# Altium PCB SMC1940-A.PcbDoc (part 1 of 2)
Units mm, origin at the board's own origin, x right, y up, seen from the top; angles counter-clockwise.
Board outline 62.1 x 94.1 mm, 2 copper layers (Top Layer, Bottom Layer); 95 components, 94 nets, 577 pads, 44 vias.
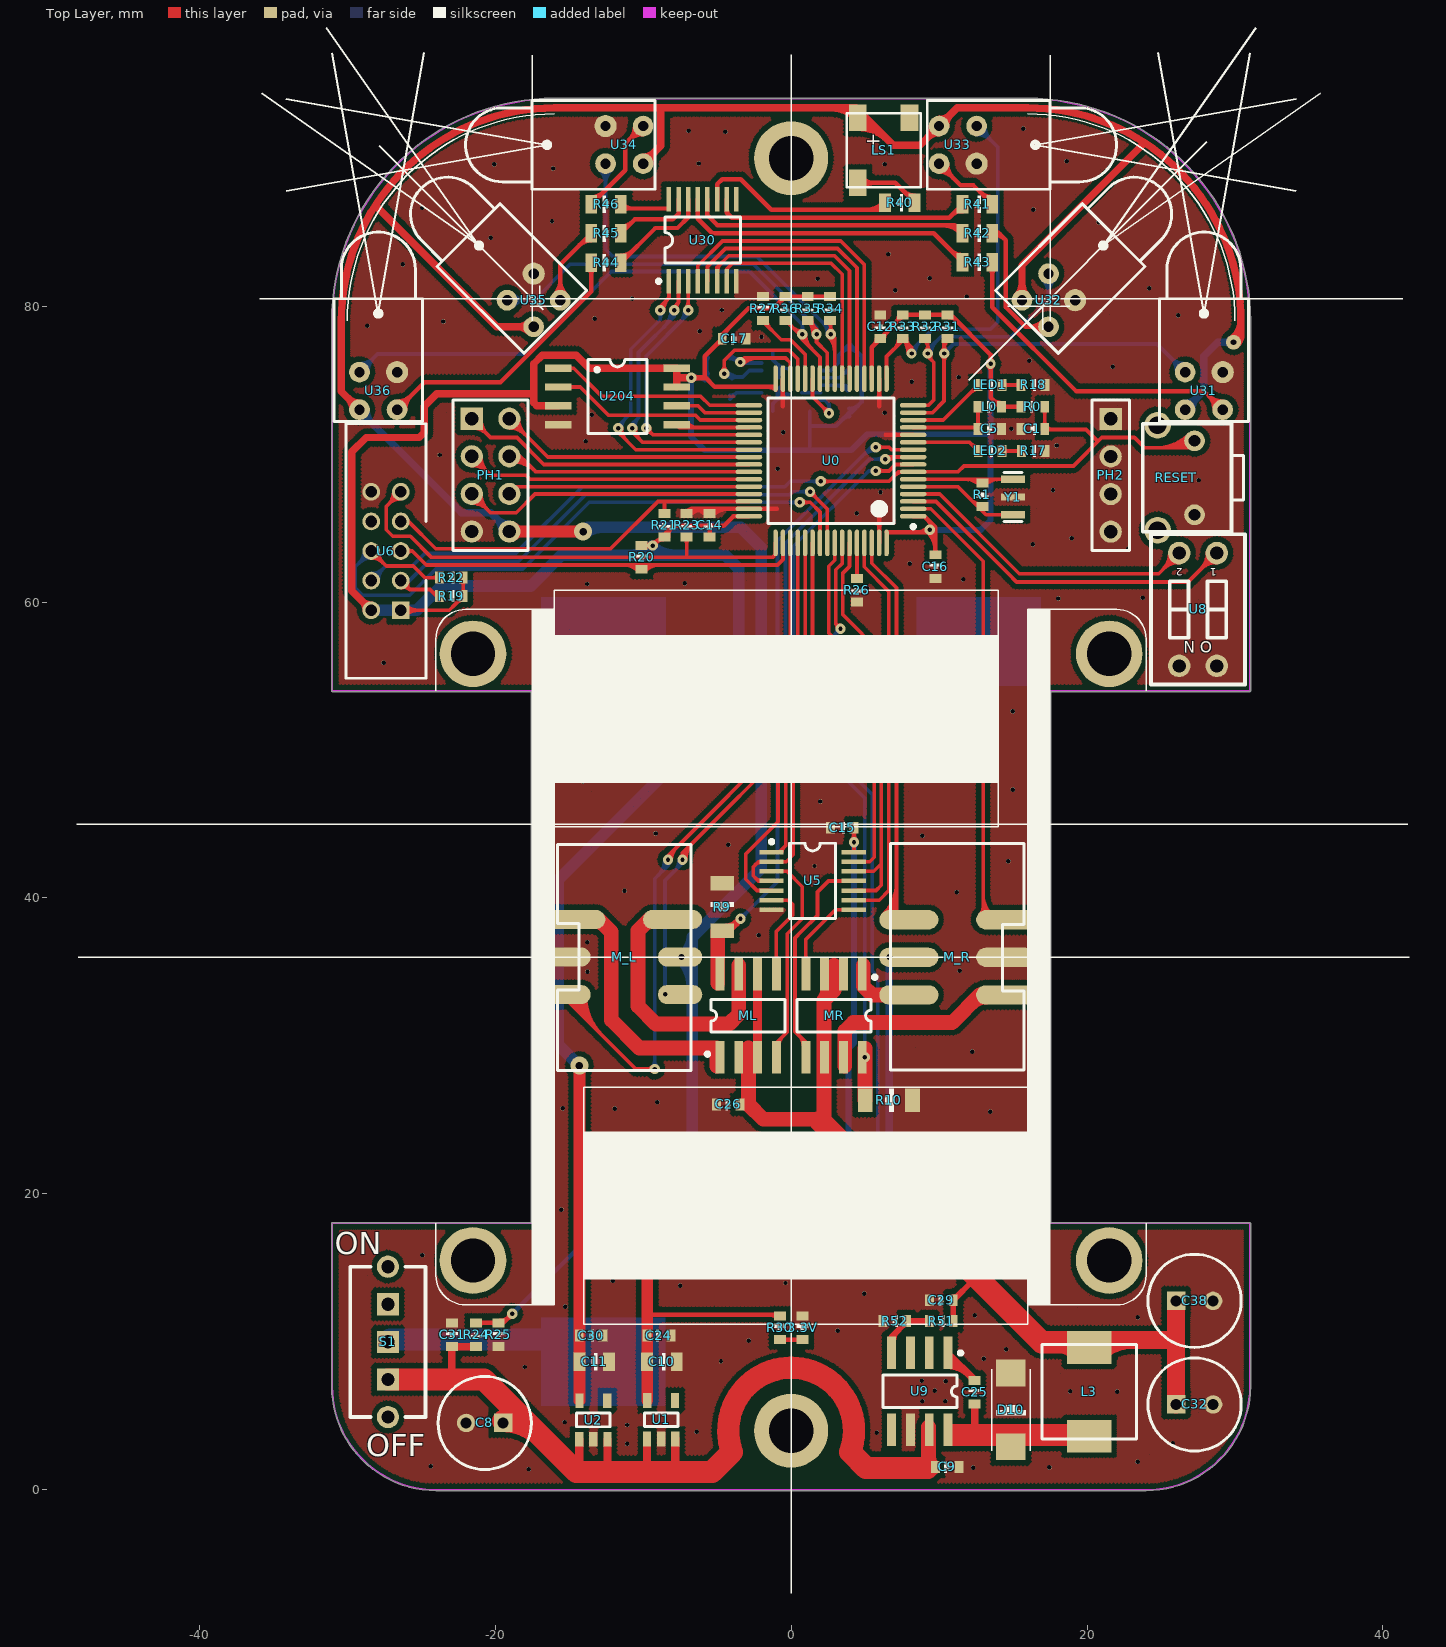
[diagram p0: Top Layer view]
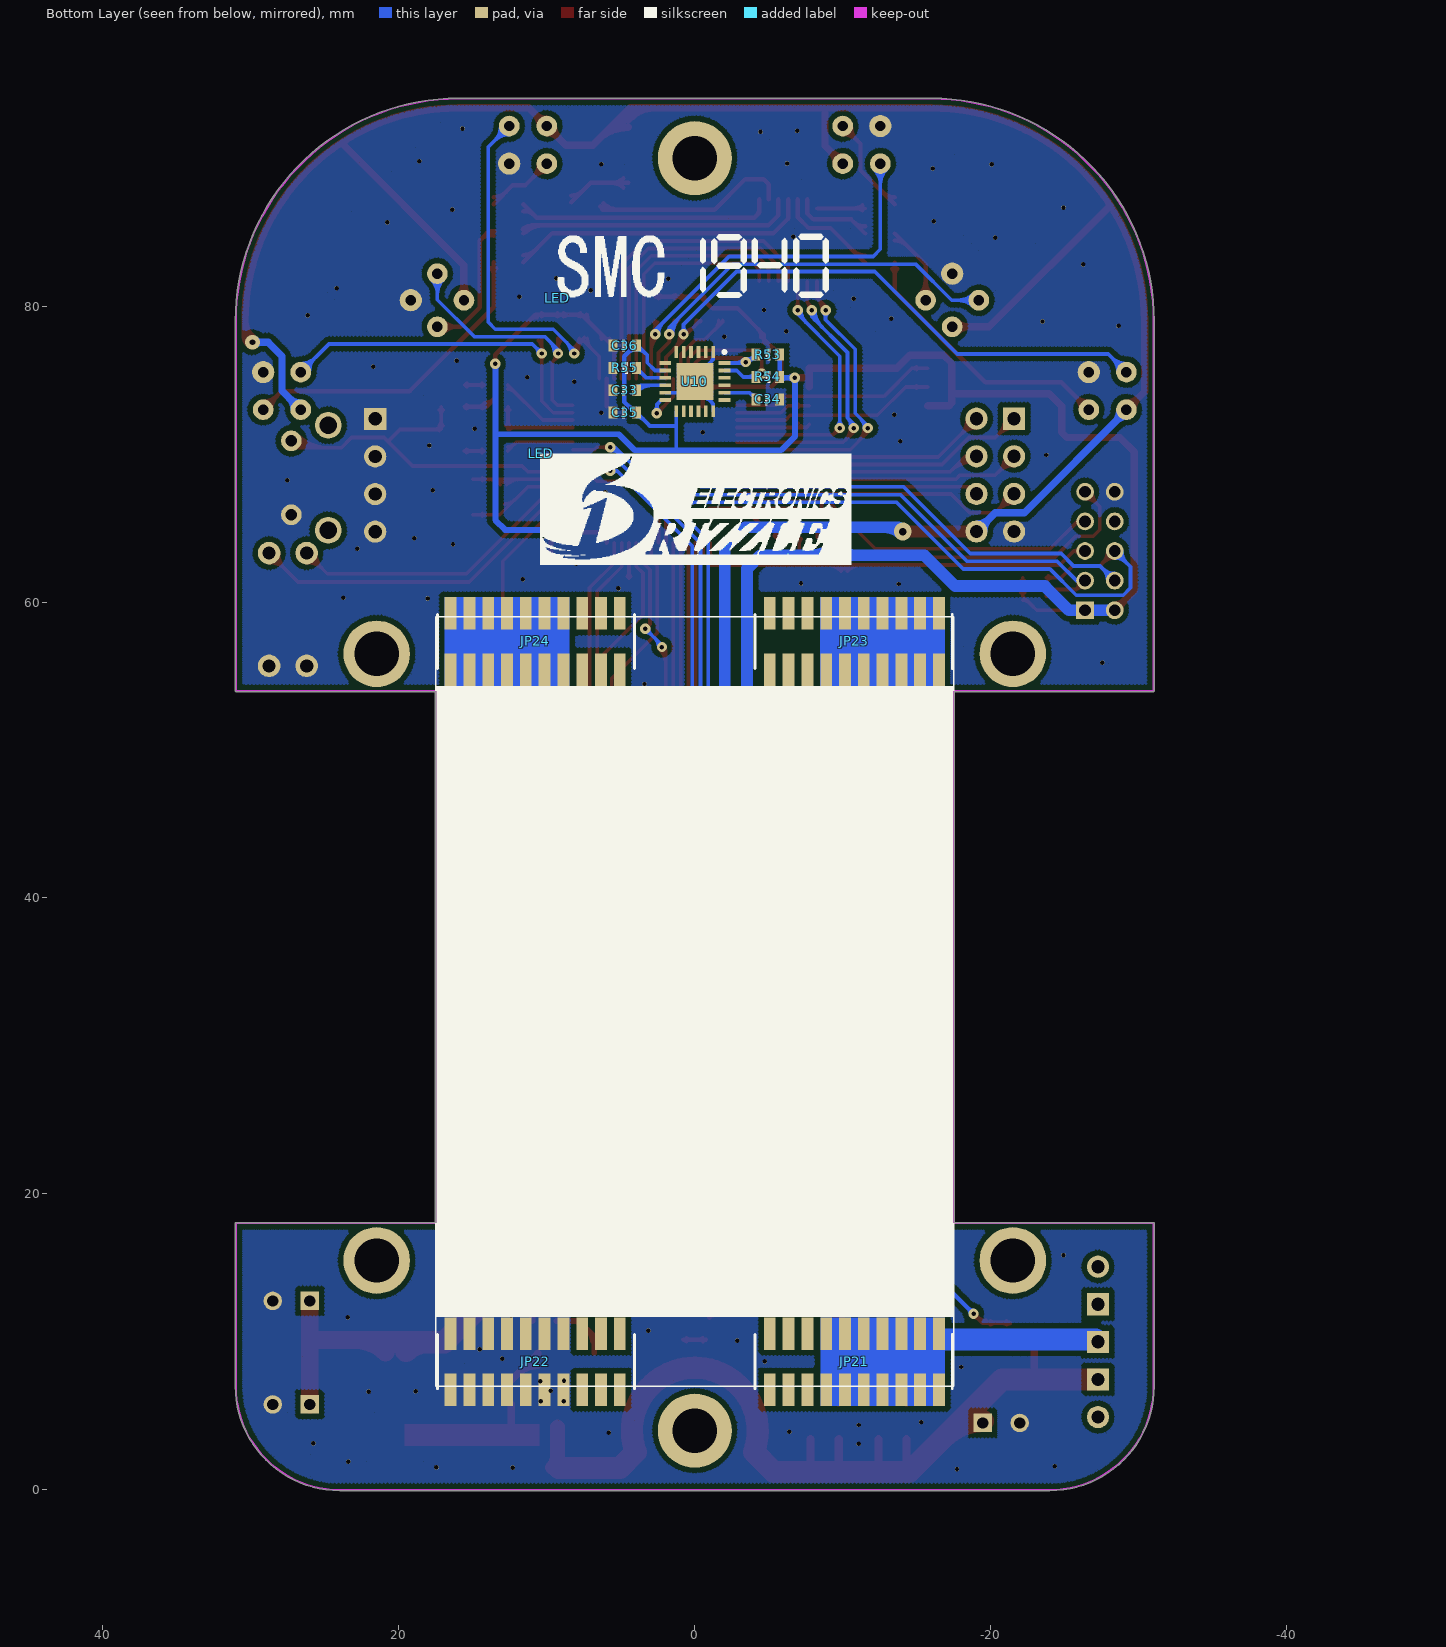
[diagram p1: Bottom Layer view, seen from below]

## Layer stack, top to bottom
Top Layer: signal copper 0.0356
Dielectric: dielectric 0.32, FR-4, Dk 4.8
Bottom Layer: signal copper 0.0356

## Board outline
-31.05,7 cw(c-31,7) -31.05,7.001 -31.05,7 ccw(c-24,7) -24,-0.05 24,-0.05 ccw(c24,7) 31.05,7 ccw(c31,7) 31.05,7.001 31.05,18 ccw(c31,18) 31,18.05 17.55,18.05 17.55,53.95 31,53.95 ccw(c31,54) 31.05,54 31.05,79 cw(c31,79) 31.05,78.999 31.05,79 ccw(c16,79) 16,94.05 -16,94.05 ccw(c-16,79) -31.05,79 ccw(c-31,79) -31.05,78.999 -31.05,54 ccw(c-31,54) -31,53.95 -17.55,53.95 -17.55,18.05 -31,18.05 ccw(c-31,18) -31.05,18

## Design rules (kind name [scope] priority, off if disabled: settings)
Clearance [All] p1: gap=0.2
FabricationTestPointUsage TestPointUsage [All] p1: valid=0 allowmultiple=FALSE
FabricationTestpoint Testpoint [All] p1: side=3 testpointundercomponent=TRUE minsize=1.016 maxsize=2.54 preferedsize=1.524 minholesize=0 maxholesize=1.016 preferedholesize=0.813 testpointgrid=0.025 allowsidetop=TRUE allowsidebottom=TRUE usegrid=TRUE gridtolerance=0
PlaneConnect [All] p1: planeconnectstyle=Direct reliefexpansion=0.508 reliefentries=4 reliefconductorwidth=0.254 reliefairgap=0.254
PolygonConnect [All] p1: connectstyle=Direct reliefconductorwidth=0.254 reliefentries=4 polygonreliefangle="90 Angle"
RoutingVias [All] p1: holewidth=0.711 width=1.27 viastyle="Through Hole" minholewidth=0.711 minwidth=1.27 maxholewidth=0.711 maxwidth=1.27
SilkscreenOverComponentPads [All] p1: minsilkscreentomaskgap=0.254
SolderMaskExpansion [All] p1: expansion=0.06
Width [All] p1: maxlimit=5 minlimit=0.01 preferedwidth=0.5 bottomlayer_prefwidth=0.25 minimp=50.000000 maximp=50.000000 favimp=50.000000
24 further rules are at their usual default settings.

## Components (designator, comment, footprint, x,y, rotation, side; value= is the part's Value field where it differs from the comment)
3.3V "LED0" YU-SMD0603 0.781,10.95 r90 top
C1 "104" YU-SMD0603 16.34,71.7 r0 top
C5 "104" YU-SMD0603 13.43,71.7 r180 top
C8 "100uF" CAPPR2.5-6.3X5 -20.71,4.52 r180 top locked
C9 "104" YU-SMD0603 10.55,1.55 r180 top
C10 "" YU-SMD0805 -8.73,8.66 r0 top
C11 "" YU-SMD0805 -13.31,8.66 r0 top
C12 "104" YU-SMD0603 6.03,78.61 r270 top
C14 "104" YU-SMD0603 -5.51,65.19 r270 top
C15 "104" YU-SMD0603 3.45,44.75 r0 top
C16 "104" YU-SMD0603 9.75,62.4 r90 top
C17 "104" YU-SMD0603 -3.85,77.8 r180 top
C24 "104" YU-SMD0603 -8.93,10.43 r180 top
C25 "103" YU-SMD0603 12.4,6.6 r90 top
C26 "104" YU-SMD0603 -4.25,26.05 r180 top
C29 "104" YU-SMD0603 10.16,12.81 r180 top
C30 "104" YU-SMD0603 -13.52,10.43 r0 top
C31 "104" YU-SMD0603 -22.91,10.48 r90 top
C32 "220uF" CAPPR2.5-6.3X5 27.27,5.77 r0 top locked
C33 "104" YU-SMD0603 4.73,74.311 r0 bottom
C34 "222" YU-SMD0603 -4.93,73.7 r0 bottom
C35 "104" YU-SMD0603 4.73,72.8 r0 bottom
C36 "104" YU-SMD0603 4.73,77.334 r0 bottom
C38 "220uF" CAPPR2.5-6.3X5 27.27,12.77 r0 top locked
D10 "B340A" DO-214 14.85,5.4 r270 top locked
JP21 "" MSHDR2X10#1 -16.5,9.3 r180 bottom locked
JP22 "" MSHDR2X10#2 16.5,9.3 r0 bottom locked
JP23 "" MSHDR2X10#2 -16.5,56.7 r180 bottom locked
JP24 "" MSHDR2X10#1 16.5,56.7 r0 bottom locked
L0 "10uH" YU-SMD0603 13.43,73.2 r180 top
L3 "15uH" HC0603 20.15,6.62 r90 top locked
LED "Comment" SMC1940 9.29,80.535 r180 bottom
LED "Comment" LOGO_EN_7.5 10.421,70.03 r180 bottom
LED1 "B" YU-SMD0603 13.45,74.67 r0 top
LED2 "R" YU-SMD0603 13.45,70.21 r0 top
LS1 "" 蜂鸣器5020 3.76,93.03 r270 top locked
M_L "" DC3-6PS#1 -12.55,38.55 r270 top locked
M_R "" DC3-6PS#2 12.5,33.45 r90 top locked
ML "BD6221F" SO-G8#1 -2.9,32.05 r0 top locked
MR "BD6221F" SO-G8#1 2.9,32.05 r180 top locked
PH1 "" HDR2X4 -21.58,72.39 r270 top locked
PH2 "Header 4" HDR1X4 21.6,72.38 r270 top locked
R0 "10K" YU-SMD0603 16.34,73.2 r180 top
R1 "1M" YU-SMD0603 12.93,67.25 r270 top
R9 "0.2" YU-SMD1206 -4.65,39.39 r90 top
R10 "0.2" YU-SMD1206 6.61,26.34 r0 top
R17 "" YU-SMD0603 16.36,70.21 r0 top
R18 "" YU-SMD0603 16.35,74.67 r0 top
R19 "10K" YU-SMD0603 -22.96,60.4 r0 top
R20 "10K" YU-SMD0603 -10.1,63.02 r90 top
R21 "10K" YU-SMD0603 -8.56,65.19 r270 top
R22 "10K" YU-SMD0603 -22.96,61.65 r0 top
R23 "10K" YU-SMD0603 -7.06,65.19 r270 top
R24 "20K" YU-SMD0603 -21.291,10.48 r270 top
R25 "10K" YU-SMD0603 -19.78,10.48 r90 top
R26 "10K" YU-SMD0603 4.45,60.8 r270 top
R27 "10K" YU-SMD0603 -1.9,79.84 r90 top
R30 "" YU-SMD0603 -0.76,10.95 r90 top
R31 "10K" YU-SMD0603 10.564,78.61 r270 top
R32 "10K" YU-SMD0603 9.052,78.61 r270 top
R33 "10K" YU-SMD0603 7.541,78.61 r270 top
R34 "10K" YU-SMD0603 2.634,79.84 r270 top
R35 "10K" YU-SMD0603 1.122,79.84 r270 top
R36 "10K" YU-SMD0603 -0.389,79.84 r270 top
R40 "100" YU-SMD0805 7.35,87 r0 top
R41 "100" YU-SMD0805 12.595,86.892 r0 top
R42 "100" YU-SMD0805 12.595,84.931 r0 top
R43 "100" YU-SMD0805 12.595,82.97 r0 top
R44 "100" YU-SMD0805 -12.51,82.94 r180 top
R45 "100" YU-SMD0805 -12.51,84.91 r180 top
R46 "100" YU-SMD0805 -12.51,86.881 r180 top
R51 "10K" YU-SMD0603 10.16,11.41 r0 top
R52 "2.32K" YU-SMD0603 7.01,11.41 r0 top
R53 "5.1K" YU-SMD0603 -4.93,76.722 r180 bottom
R54 "5.1K" YU-SMD0603 -4.93,75.211 r180 bottom
R55 "5.1K" YU-SMD0603 4.73,75.822 r180 bottom
RESET "SW-PB" KEY3*6C 23.77,64.75 r0 top locked
S1 "" SWITCH_L -27.25,10 r270 top locked
U0 "STM32F103RE" LQFP64_N 2.7,69.55 r180 top locked
U1 "SPX3819-5.0" YU-SOT23-5 -8.78,4.74 r0 top locked
U2 "SPX3819-3.3" YU-SOT23-5 -13.37,4.72 r0 top locked
U5 "74HC08" TSSO5x6-G14/X.3 1.45,41.15 r270 top locked
U6 "Header 5X2" DownLoad2-2*5 -27.38,63.45 r90 top locked
U8 "" SW-2 27.5,59.5 r180 top locked
U9 "TPS5430" SO-G8#2 8.7,6.65 r180 top locked
U10 "MPU-6050" QFN-24 0,74.9 r270 bottom locked
U30 "ULN2003APW" TSSO5x6-G16 -5.98,84.46 r0 top locked
U31 "" F5-2 27.9,73 r0 top locked
U32 "" F5-2 16.5,79.5 r315 top locked
U33 "" F5-2 10,90.9 r270 top locked
U34 "" F5-2 -10,90.9 r90 top locked
U35 "" F5-2 -16.5,79.5 r45 top locked
U36 "" F5-2 -27.9,73 r0 top locked
U204 "W25Q32" SOP8 -11.74,73.9 r0 top locked
Y1 "XTAL" 晶振3213 15,67.1 r90 top locked

## Footprints (in the part's own frame and the unit in brackets; to place one, negate y for a bottom-side part, rotate by r counter-clockwise, add the part's x,y. Pads: shape width x height; smd on the part's side, far side on the other; paste and mask are expansions set on the pad)
CAPPR2.5-6.3X5 [mm]
  rect 1.25x1.25 hole 0.75: 1(-1.25,0)
  round 1.25 hole 0.75: 2(1.25,0)
  silkscreen extent -3.15,-3.15 3.15,3.15
DC3-6PS#1 [mm]
  oval 1.3x4 smd: 1(0,-2) 2(0,4.54)
  oval 1.3x3 smd: 3(2.54,-2.5) 4(2.54,5.05) 5(5.08,-2.5) 6(5.08,5.05)
  silkscreen extent -5.08,-3.23 10.22,5.77
DC3-6PS#2 [mm]
  oval 1.3x4 smd: 1(0,-2) 2(0,4.54) 3(2.54,-2) 4(2.54,4.54) 5(5.08,-2) 6(5.08,4.54)
  silkscreen extent -5.08,-3.23 10.22,5.77
DO-214 [mm]
  rect 1.8x2 smd: 1(-2.5,0) 2(2.5,0)
  silkscreen extent -2.75,-1.3 2.75,1.3
DownLoad2-2*5 [mm]
  rect 1.2x1.2 hole 0.8: 1(-4,-1)
  round 1.2 hole 0.8: 2(-4,1) 3(-2,-1) 4(-2,1) 5(0,-1) 6(0,1) 7(2,-1) 8(2,1) 9(4,-1) 10(4,1)
  silkscreen extent -8.6,-2.7 8.6,2.7
F5-2 [mm]
  round 1.4 hole 0.7: 1(-1.27,0) 2(1.27,0) 4(-1.27,2.54)
  round 1.5 hole 0.7: 3(1.27,2.54)
  silkscreen extent -3,-0.8 3,12
HC0603 [mm]
  rect 2.2x3 smd: 1(-3,0) 2(3,0)
  silkscreen extent -3.2,-3.2 3.2,3.2
HDR1X4 [mm] "Connector; Header; 4 Position"
  rect 1.5x1.5 hole 0.9: 1(0,0)
  round 1.5 hole 0.9: 2(2.54,0) 3(5.08,0) 4(7.62,0)
  silkscreen extent -1.27,-1.27 8.89,1.27
HDR2X4 [mm] "Connector; Header; 4x2 Position"
  rect 1.5x1.5 hole 0.9: 1(0,0)
  round 1.5 hole 0.9: 2(0,2.54) 3(2.54,0) 4(2.54,2.54) 5(5.08,0) 6(5.08,2.54) 7(7.62,0) 8(7.62,2.54)
  silkscreen extent -1.27,-1.27 8.89,3.81
KEY3*6C [mm]
  round 1.8 hole 1.2: 0(1,0.1) 0(1,7.2)
  round 1.4 hole 0.8: 1(3.5,6.15) 2(3.5,1.15)
  silkscreen extent 0,0 6.79,7.3
LOGO_EN_7.5 [mm]
  silkscreen extent 0.03,-7.49 21.01,-0.03
LQFP64_N [mm]
  oval 1.8x0.3 smd: 1(-5.55,3.75) 2(-5.55,3.25) 3(-5.55,2.75) 4(-5.55,2.25) 5(-5.55,1.75) 6(-5.55,1.25) 7(-5.55,0.75) 8(-5.55,0.25) 9(-5.55,-0.25) 10(-5.55,-0.75) 11(-5.55,-1.25) 12(-5.55,-1.75) 13(-5.55,-2.25) 14(-5.55,-2.75) 15(-5.55,-3.25) 16(-5.55,-3.75) 33(5.55,-3.75) 34(5.55,-3.25) 35(5.55,-2.75) 36(5.55,-2.25) 37(5.55,-1.75) 38(5.55,-1.25) 39(5.55,-0.75) 40(5.55,-0.25) 41(5.55,0.25) 42(5.55,0.75) 43(5.55,1.25) 44(5.55,1.75) 45(5.55,2.25) 46(5.55,2.75) 47(5.55,3.25) 48(5.55,3.75)
  oval 0.3x1.8 smd: 17(-3.75,-5.55) 18(-3.25,-5.55) 19(-2.75,-5.55) 20(-2.25,-5.55) 21(-1.75,-5.55) 22(-1.25,-5.55) 23(-0.75,-5.55) 24(-0.25,-5.55) 25(0.25,-5.55) 26(0.75,-5.55) 27(1.25,-5.55) 28(1.75,-5.55) 29(2.25,-5.55) 30(2.75,-5.55) 31(3.25,-5.55) 32(3.75,-5.55) 49(3.75,5.55) 50(3.25,5.55) 51(2.75,5.55) 52(2.25,5.55) 53(1.75,5.55) 54(1.25,5.55) 55(0.75,5.55) 56(0.25,5.55) 57(-0.25,5.55) 58(-0.75,5.55) 59(-1.25,5.55) 60(-1.75,5.55) 61(-2.25,5.55) 62(-2.75,5.55) 63(-3.25,5.55) 64(-3.75,5.55)
  silkscreen extent -5.68,-4.25 4.25,4.57
MSHDR2X10#1 [mm]
  rect 0.8x2.2 smd: 1(0,1.26) 2(0,-2.53) 3(-1.27,1.26) 4(-1.27,-2.53) 5(-2.54,1.26) 6(-2.54,-2.53) 7(-3.81,1.26) 8(-3.81,-2.53) 9(-5.08,1.26) 10(-5.08,-2.53) 11(-6.35,1.26) 12(-6.35,-2.53) 13(-7.62,1.26) 14(-7.62,-2.53) 15(-8.89,1.26) 16(-8.89,-2.53) 17(-10.16,1.26) 18(-10.16,-2.53) 19(-11.43,1.26) 20(-11.43,-2.53)
  silkscreen extent -12.43,-2.47 0.9,1.2
MSHDR2X10#2 [mm]
  rect 0.8x2.2 smd: 1(0,-1.26) 2(0,2.53) 3(-1.27,-1.26) 4(-1.27,2.53) 5(-2.54,-1.26) 6(-2.54,2.53) 7(-3.81,-1.26) 8(-3.81,2.53) 9(-5.08,-1.26) 10(-5.08,2.53) 11(-6.35,-1.26) 12(-6.35,2.53) 13(-7.62,-1.26) 14(-7.62,2.53) 15(-8.89,-1.26) 16(-8.89,2.53) 17(-10.16,-1.26) 18(-10.16,2.53) 19(-11.43,-1.26) 20(-11.43,2.53)
  silkscreen extent -12.43,-1.2 0.9,2.47
QFN-24 [mm] "0.5mm"
  rect 2.5x2.5 smd: 0(0,0)
  rect 0.8x0.25 smd: 1(-2,1.25) 2(-2,0.75) 3(-2,0.25) 4(-2,-0.25) 5(-2,-0.75) 6(-2,-1.25) 13(2,-1.25) 14(2,-0.75) 15(2,-0.25) 16(2,0.25) 17(2,0.75) 18(2,1.25)
  rect 0.25x0.8 smd: 7(-1.25,-2) 8(-0.75,-2) 9(-0.25,-2) 10(0.25,-2) 11(0.75,-2) 12(1.25,-2) 19(1.25,2) 20(0.75,2) 21(0.25,2) 22(-0.25,2) 23(-0.75,2) 24(-1.25,2)
  silkscreen extent -2.1,1.9 -1.9,2.1
SMC1940 [mm]
  silkscreen extent 0.05,0 18.36,4.37
SO-G8#1 [mm]
  rect 0.6x2.2 smd: 1(-1.905,-2.8) 2(-0.635,-2.8) 3(0.635,-2.8) 4(1.905,-2.8) 5(1.905,2.8) 6(0.635,2.8) 7(-0.635,2.8) 8(-1.905,2.8)
  silkscreen extent -2.88,-2.72 2.5,1.1
SO-G8#2 [mm]
  rect 0.6x2.2 smd: 1(-1.905,-2.6) 2(-0.635,-2.6) 3(0.635,-2.6) 4(1.905,-2.6) 5(1.905,2.6) 6(0.635,2.6) 7(-0.635,2.6) 8(-1.905,2.6)
  silkscreen extent -2.88,-2.72 2.5,1.1
SOP8 [mm]
  rect 1.8x0.5 smd: 1(-4,1.905) 2(-4,0.635) 3(-4,-0.635) 4(-4,-1.905) 5(4,-1.905) 6(4,-0.635) 7(4,0.635) 8(4,1.905)
  silkscreen extent -2,-2.5 2,2.5
SW-2 [mil]
  round 60 hole 35: 1(-50,-150) 2(50,-150) 3(-50,150) 4(50,150)
  silkscreen extent -125,-200 125,200
SWITCH_L [mm]
  round 1.5 hole 0.9: 0(-5.08,0) 0(5.08,0)
  rect 1.5x1.5 hole 0.9: 1(-2.54,0) 2(0,0) 3(2.54,0)
  silkscreen extent -5.08,-2.54 5.08,2.54
TSSO5x6-G14/X.3 [mm]
  rect 0.3x1.65 smd: 1(-1.95,-2.775) 2(-1.3,-2.775) 3(-0.65,-2.775) 4(0,-2.775) 5(0.65,-2.775) 6(1.3,-2.775) 7(1.95,-2.775) 8(1.95,2.775) 9(1.3,2.775) 10(0.65,2.775) 11(0,2.775) 12(-0.65,2.775) 13(-1.3,2.775) 14(-1.95,2.775)
  silkscreen extent -2.77,-2.9 2.55,1.55
TSSO5x6-G16 [mm]
  rect 0.3x1.65 smd: 1(-2.275,-2.775) 2(-1.625,-2.775) 3(-0.975,-2.775) 4(-0.325,-2.775) 5(0.325,-2.775) 6(0.975,-2.775) 7(1.625,-2.775) 8(2.275,-2.775) 9(2.275,2.775) 10(1.625,2.775) 11(0.975,2.775) 12(0.325,2.775) 13(-0.325,2.775) 14(-0.975,2.775) 15(-1.625,2.775) 16(-2.275,2.775)
  silkscreen extent -3.1,-2.9 2.55,1.55
YU-SMD0603 [mm]
  rect 0.6x0.8 smd: 1(-0.8,0) 2(0.8,0)
  silkscreen extent -0.15,-0.4 0.2,0.4
YU-SMD0805 [mm]
  rect 0.8x1.25 smd: 1(-1,0) 2(1,0)
  silkscreen extent -0.19,-0.59 0.23,0.59
YU-SMD1206 [mm]
  rect 1x1.6 smd: 1(-1.6,0) 2(1.6,0)
  silkscreen extent -0.28,-0.79 0.35,0.79
YU-SOT23-5 [mm]
  rect 0.55x1 smd: 1(-0.95,-1.304) 2(0,-1.304) 3(0.95,-1.304) 4(0.94,1.295) 5(-0.94,1.295)
  silkscreen extent -1.14,-0.46 1.14,0.46
晶振3213 [mm]
  rect 0.5x1.63 smd: 0(0,0)
  rect 0.5x1.6 smd: 1(-1.2,0) 2(1.2,0)
  silkscreen extent -1.65,-0.6 1.65,0.6
蜂鸣器5020 [mm]
  rect 1.8x1.2 smd: 0(0.3,4.25) 1(0.3,0.75) 2(4.7,0.75)
  silkscreen extent 0,0 5,5

## Part data
3.3V: "Typical INFRARED GaAs LED"
C1 C5 C9 C12 C14 C15 C16 C17 C24 C25 C26 C29 C30 C31 C33 C34 C35 C36: library part Cap, "Capacitor"
C8 C32 C38: library part "Cap Pol2", "Polarized Capacitor (Axial)"
C10 C11: library part "Cap Pol1", "Polarized Capacitor (Radial)"
D10: library part "Diode 11DQ03", "Schottky Rectifier"
JP21 JP22 JP23 JP24: library part MHDR2X10, "Header, 10-Pin, Dual row"
L0: library part Res1, "Resistor"
L3: library part "Inductor Iron", "Magnetic-Core Inductor"
LED1 LED2: library part LED0, "Typical INFRARED GaAs LED"
LS1: library part Speaker, "Loudspeak"
M_L M_R: library part "Header 3X2", "Header, 3-Pin, Dual row"
PH1 PH2: library part "Header 4X2", "Header, 4-Pin, Dual row"
R0 R1 R9 R10 R17 R18 R19 R20 R21 R22 R23 R24 R25 R26 R27 R30 R31 R32 R33 R34 R35 R36 R40 R41 R42 R43 R44 R45 R46 R51 R52 R53 R54 R55: library part Res2, "Resistor"
S1: library part SW-SPDT, "SPDT Subminiature Toggle Switch, Right Angle Mounting, Vertical Actuation"
U0: library part STM32F101RC, "STM32 ARM-based 32-bit MCU with 128 Kbytes Flash, 64-pin LQFP, Industrial Temperature"
U1 U2: library part REG1117-3.3, "800mA and 1A Low Dropout Positive Regulator 2.85V, 3.3V, 5V, and Adjustable"
U5: library part MC74HC08AD, "Quad 2-Input AND Gate"
U6: "Header, 5-Pin, Dual row"
U8: library part "Header 2X2", "Header, 2-Pin, Dual row"
U9: library part TPS2430
U30: library part ULN2003D, "Seven Darlington Array"
U31 U32 U33 U34 U35 U36: library part 光耦
U204: library part FM25H20
Y1: "Crystal Oscillato"

## Free pads (board coordinates)
  round 4.5 hole 3: 0(-21.5,15.5) 0(-21.5,56.5) 0(21.5,15.5) 0(21.5,56.5)
  round 0.3 hole 0.3: 0(-4.74,8.68) 0(-4.2,23.78) 0(12.3,1.5) 1(-15.26,12.38) 1(8.839,7.366) 2(-24.92,15.86) 2(10.44,7.34) 3(-24.34,1.6) 3(5.8,3.86) 4(-17.72,1.4) 4(8.86,6) 5(-15.3,4.58) 5(10.42,6) 6(-11.08,4.38) 6(4.94,13.26) 7(-6.38,3.92) 7(9.72,6.7) 8(-18,8.3) 8(14.54,9.5) 9(-11.54,20.38) 10(-11.08,3.1) 11(-11.22,17.4) 12(-12.06,14.14) 13(-7.5,13.8) 14(-3.88,16.16) 15(-0.74,23.12) 16(-10.08,22.8) 17(-11.92,25.76) 18(-2.86,10.08) 19(3.14,10.76) 20(-0.38,13.98) 21(13.02,8.86) 22(3.28,16.2) 23(18.86,6.66) 24(22.04,6.64) 25(23.42,1.9) 26(23.44,11.66) 27(10.86,19.16) 28(14.28,15.68) 29(25.78,3.14) 30(12.42,11.8) 31(17.46,1.52) 32(12.24,29.62) 33(13.46,25.56) 34(9.46,23.7) 35(13.82,20.76) 36(-15.44,25.78) 37(-15.52,18.94) 38(-9.04,26.2) 39(-13.76,35.02) 40(-13.78,37.02) 41(11.4,35.08) 42(11.2,40.4) 43(8.86,44.2) 44(11.32,48.34) 45(14.98,52.62) 46(14.98,47.32) 47(14.68,42.48) 48(9.16,52.66) 49(1.98,46.52) 50(3.4,54.46) 51(1.58,42.16) 52(4.22,50.92) 53(-2.2,37.48) 54(-4.24,43.6) 55(-11.26,40.48) 56(-9.16,44.36) 57(-5.22,48.04) 58(-14.08,51.78) 59(-9.22,51.64) 60(-14.08,47.88) 61(-27.54,55.9) 62(-13.78,61.22) 63(-7.18,61.26) 64(-13.88,70.88) 65(-13.48,72.66) 66(-23.76,69.94) 67(4.44,66) 68(-0.9,69) 69(-0.54,71.48) 70(6.32,72.78) 71(6.04,67.42) 72(5.16,60.92) 73(8.02,62.6) 74(11.62,61.54) 75(18.06,60.24) 76(16.34,63.9) 77(23.76,60.28) 78(18.96,64.32) 79(17.7,67.56) 80(22.8,63.6) 81(27.54,68.24) 82(17.94,70.58) 83(16.1,76.32) 84(8.16,74.9) 85(11.32,75.2) 86(14.88,71.7) 87(21.74,75.9) 88(26.16,79.38) 89(24.2,81.22) 90(18.62,89.8) 91(15.7,92) 92(16.38,86.52) 93(20.78,85.66) 94(6.58,83.52) 95(7.04,81.06) 96(9.36,81.88) 97(1.8,81.84) 98(11.86,80.62) 99(6.32,89.6) 100(-6.92,91.84) 101(-4.44,91.78) 102(-6.24,89.64) 103(-2,77.92) 104(-4.68,79.74) 105(-6.18,78.3) 106(-13.28,79.16) 107(-10.74,80.5) 108(-6.66,84.68) 109(-23.5,78.96) 110(-28.64,78.66) 111(-20.3,84.62) 112(-24.92,86.66) 113(-20.06,89.58) 114(-16.08,89.3) 115(-16.16,85.74) 116(-26.24,82.82)
  round 5 hole 3: 0(0,4) 0(0,90)

## Via types
v1: diameter 0.7, hole 0.3, Top Layer to Bottom Layer, tented both sides, 38 vias
v2: diameter 1.2, hole 0.5, Top Layer to Bottom Layer, tented both sides, 3 vias
v3: diameter 1, hole 0.4, Top Layer to Bottom Layer, tented both sides, 3 vias

## Nets (pads, with @x,y where several pads share a name; then routed paths per layer and width w, separated by ;. In a path a pad name is that pad's centre, name@x,y a point inside that pad or via, vN(x,y) a via of type N, cw(c..) or ccw(c..) an arc to the next point about the centre after c; other vN are vias at no path point)
3.3V: C11.1 C12.2 C14.2 C15.2 C16.2 C17.2 C30.1 C35.1 C36.1 L0.1 R0.2 R19.2 R20.2 R21.2 R22.2 R31.1 R32.1 R33.1 R34.1 R35.1 R36.1 R53.2 R54.2 U0.1 U0.19 U0.32 U0.48 U0.64 U2.5 U5.14 U6.1 U6.2 U10.8 U10.13 U204.3 U204.7 U204.8 | length 362
  Top Layer w0.25: U6.1@-26.38,59.45 -23.11,59.45 -22.723,59.837 R19.2@-22.16,60.4 R22.2@-22.16,61.65 ; U6.1@-26.044,59.114 cw(c-25.233,58.303) -25.233,59.45 cw(c-25.233,60.597) U6.1@-26.044,59.786 ; -22.16,60.922 ccw(c-21.738,60.922) -22.036,60.624 cw(c-21.738,60.922) -22.16,60.922 ; -22.16,60.922 cw(c-22.582,60.922) -22.284,60.624 ccw(c-22.582,60.922) -22.16,60.922 ; -22.16,61.128 ccw(c-22.582,61.128) -22.284,61.426 cw(c-22.582,61.128) -22.16,61.128 ; -22.16,61.128 cw(c-21.738,61.128) -22.036,61.426 ccw(c-21.738,61.128) -22.16,61.128 ; -22.629,59.931 cw(c-22.16,59.461) -22.16,60.125 ccw(c-22.16,59.461) -22.629,59.931
  Top Layer w0.3: R20.2@-10.1,63.82 v1(-9.36,63.82) ; v1@-9.34,63.82 -9.28,63.88 -8.665,64.495 -8.56,64.6 -8,65.16 ; -5.84,75.16 -5.84,76.61 C17.2@-4.65,77.8 -4.65,78.09 -2.88,79.86 -1.169,79.86 R36.1@-0.389,80.64 R34.1@2.634,80.64 ; -5.84,75.22 -5.16,74.54 U0.32@-1.1,74.54 ; C14.2@-5.51,64.39 -5.51,65.15 ; U0.48@-2.85,65.8 -3.9,65.8 -4.54,65.16 -8,65.16 ; U5.14@4.25,43.125 C15.2@4.25,44.75 ; U0.19@5.45,75.1 5.45,77.23 7.63,79.41 10.79,79.41 13.48,76.72 13.48,73.82 14.1,73.2 L0.1@14.23,73.2 R0.2@15.54,73.2 ; U0.64@6.45,64.72 9.22,64.72 v1(9.38,64.88) ; U0.1@8.25,65.8 9,65.8 9.75,65.05 C16.2@9.75,63.2 ; R20.2@-9.843,63.82 ccw(c-9.843,64.303) -9.501,63.961 cw(c-9.843,64.303) R20.2@-9.843,63.82 ; R20.2@-9.843,63.82 cw(c-9.843,63.337) -9.501,63.679 ccw(c-9.843,63.337) R20.2@-9.843,63.82 ; v1@-9.638,63.82 ccw(c-9.638,63.458) -9.894,63.714 cw(c-9.638,63.458) v1@-9.638,63.82 ; v1@-9.638,63.82 cw(c-9.638,64.182) -9.894,63.926 ccw(c-9.638,64.182) v1@-9.638,63.82 ; -8,65.16 ccw(c-7.251,64.411) -8.31,64.393 cw(c-7.251,64.411) -8,65.16 ; -5.51,64.752 ccw(c-5.148,64.752) -5.404,64.496 cw(c-5.148,64.752) -5.51,64.752 ; -5.51,64.752 cw(c-5.872,64.752) -5.616,64.496 ccw(c-5.872,64.752) -5.51,64.752 ; 0.073,80.64 ccw(c0.073,80.278) -0.183,80.534 cw(c0.073,80.278) 0.073,80.64 ; 0.073,80.64 cw(c0.073,81.002) -0.183,80.746 ccw(c0.073,81.002) 0.073,80.64 ; 0.66,80.64 ccw(c0.66,81.002) 0.916,80.746 cw(c0.66,81.002) 0.66,80.64 ; 0.66,80.64 cw(c0.66,80.278) 0.916,80.534 ccw(c0.66,80.278) 0.66,80.64 ; 1.585,80.64 ccw(c1.585,80.278) 1.328,80.534 cw(c1.585,80.278) 1.585,80.64 ; 1.585,80.64 cw(c1.585,81.002) 1.328,80.746 ccw(c1.585,81.002) 1.585,80.64 ; 2.171,80.64 ccw(c2.171,81.002) 2.428,80.746 cw(c2.171,81.002) 2.171,80.64 ; 2.171,80.64 cw(c2.171,80.278) 2.428,80.534 ccw(c2.171,80.278) 2.171,80.64 ; 4.25,44.243 ccw(c4.733,44.243) 4.391,43.901 cw(c4.733,44.243) 4.25,44.243 ; 4.25,44.243 cw(c3.767,44.243) 4.109,43.901 ccw(c3.767,44.243) 4.25,44.243 ; 4.25,44.288 ccw(c3.888,44.288) 4.144,44.544 cw(c3.888,44.288) 4.25,44.288 ; 4.25,44.288 cw(c4.612,44.288) 4.356,44.544 ccw(c4.612,44.288) 4.25,44.288 ; 8.003,79.41 ccw(c8.003,79.048) 7.747,79.304 cw(c8.003,79.048) 8.003,79.41 ; 8.003,79.41 cw(c8.003,79.772) 7.747,79.516 ccw(c8.003,79.772) 8.003,79.41 ; 8.59,79.41 ccw(c8.59,79.772) 8.846,79.516 cw(c8.59,79.772) 8.59,79.41 ; 8.59,79.41 cw(c8.59,79.048) 8.846,79.304 ccw(c8.59,79.048) 8.59,79.41 ; 9.515,79.41 ccw(c9.515,79.048) 9.258,79.304 cw(c9.515,79.048) 9.515,79.41 ; 9.515,79.41 cw(c9.515,79.772) 9.258,79.516 ccw(c9.515,79.772) 9.515,79.41 ; 9.75,63.562 ccw(c10.112,63.562) 9.856,63.306 cw(c10.112,63.562) 9.75,63.562 ; 9.75,63.562 cw(c9.388,63.562) 9.644,63.306 ccw(c9.388,63.562) 9.75,63.562 ; 10.101,79.41 ccw(c10.101,79.772) 10.358,79.516 cw(c10.101,79.772) 10.101,79.41 ; 10.101,79.41 cw(c10.101,79.048) 10.358,79.304 ccw(c10.101,79.048) 10.101,79.41 ; 13.48,75.617 ccw(c12.997,75.617) 13.339,75.959 cw(c12.997,75.617) 13.48,75.617 ; 13.48,75.617 cw(c13.963,75.617) 13.621,75.959 ccw(c13.963,75.617) 13.48,75.617 ; 13.48,76.583 ccw(c13.963,76.583) 13.621,76.241 cw(c13.963,76.583) 13.48,76.583 ; 13.48,76.583 cw(c12.997,76.583) 13.339,76.241 ccw(c12.997,76.583) 13.48,76.583 ; 14.592,73.2 ccw(c14.592,72.838) 14.336,73.094 cw(c14.592,72.838) 14.592,73.2 ; 14.592,73.2 cw(c14.592,73.562) 14.336,73.306 ccw(c14.592,73.562) 14.592,73.2 ; 15.178,73.2 ccw(c15.178,73.562) 15.434,73.306 cw(c15.178,73.562) 15.178,73.2 ; 15.178,73.2 cw(c15.178,72.838) 15.434,73.094 ccw(c15.178,72.838) 15.178,73.2 ; v1@-9.36,64.02 ccw(c-9.36,64.551) -8.984,64.176 cw(c-9.36,64.551) v1@-9.36,64.02 ; v1@-9.16,63.82 cw(c-8.725,63.82) -9.033,64.127 ccw(c-8.725,63.82) v1@-9.16,63.82 ; v1@-9.104,64.056 cw(c-8.66,63.612) -8.66,64.24 ccw(c-8.66,63.612) v1@-9.104,64.056 ; -5.077,77.373 cw(c-4.65,76.946) -4.65,77.55 ccw(c-4.65,76.946) -5.077,77.373 ; C17.2@-4.5,77.9 cw(c-3.679,77.9) -4.26,78.48 ccw(c-3.679,77.9) C17.2@-4.5,77.9 ; -1.509,74.54 cw(c-1.509,73.891) -1.05,74.35 ccw(c-1.509,73.891) -1.509,74.54 ; -0.816,80.213 ccw(c-1.242,80.64) -0.639,80.64 cw(c-1.242,80.64) -0.816,80.213 ; 5.603,77.383 ccw(c5.176,77.81) 5.78,77.81 cw(c5.176,77.81) 5.603,77.383 ; C12.2@6.28,77.81 cw(c6.884,77.81) 6.457,78.237 ccw(c6.884,77.81) C12.2@6.28,77.81 ; 7.052,78.832 ccw(c6.473,79.41) 7.291,79.41 cw(c6.473,79.41) 7.052,78.832 ; 8.511,64.72 ccw(c8.511,65.749) 9.239,65.021 cw(c8.511,65.749) 8.511,64.72 ; 9.204,65.596 cw(c8.536,64.927) 9.48,64.874 ccw(c8.536,64.927) 9.204,65.596 ; v1@9.239,64.739 cw(c8.004,63.504) 9.75,63.504 ccw(c8.004,63.504) v1@9.239,64.739 ; v1@9.451,64.951 cw(c8.728,64.228) 9.75,64.228 ccw(c8.728,64.228) v1@9.451,64.951 ; R31.1@10.664,79.26 cw(c10.664,78.593) 11.135,79.065 ccw(c10.664,78.593) R31.1@10.664,79.26 ; 13.595,73.705 ccw(c14.211,74.321) 14.227,73.45 cw(c14.211,74.321) 13.595,73.705
  Top Layer w0.4: -14.26,21.44 v1(-3.54,21.44) ; v1(-6.76,75.16) -5.82,75.16 ; -6.398,75.16 ccw(c-6.398,74.798) -6.654,75.054 cw(c-6.398,74.798) -6.398,75.16 ; -6.398,75.16 cw(c-6.398,75.522) -6.654,75.266 ccw(c-6.398,75.522) -6.398,75.16 ; -3.902,21.44 ccw(c-3.902,21.802) -3.646,21.546 cw(c-3.902,21.802) -3.902,21.44 ; -3.902,21.44 cw(c-3.902,21.078) -3.646,21.334 ccw(c-3.902,21.078) -3.902,21.44
  Top Layer w0.5: U6.2@-28.38,59.45 -29.69,60.76 -29.69,70.15 -28.72,71.12 -25.14,71.12 -24.8,71.46 -24.8,73.24 -23.96,74.08 -17.38,74.08 ; U204.3@-15.74,73.265 -17.185,73.265 -17.38,73.46 -17.38,76.12 -16.82,76.68 -14.52,76.68 -13.645,75.805 U204.8@-7.74,75.805 U204.7@-7.74,74.535 ; -7.74,75.16 v1(-6.76,75.16) ; -28.977,60.047 ccw(c-28.38,60.645) -28.38,59.8 cw(c-28.38,60.645) -28.977,60.047 ; -28.977,60.047 cw(c-29.575,59.45) -28.73,59.45 ccw(c-29.575,59.45) -28.977,60.047
  Top Layer w0.8: U2.5@-14.31,6.015 v2(-14.31,28.67)
  Bottom Layer w0.25: 1.25,70.35 U10.13@1.25,72.9 ; U10.8@2,75.65 2.69,75.65 3.22,76.18 3.22,76.7 C36.1@3.854,77.334 ; C35.1@3.908,72.778 C35.1@3.93,72.8 ; 3.33,76.81 cw(c3.93,76.21) 3.93,77.059 ccw(c3.93,76.21) 3.33,76.81
  Bottom Layer w0.3: R54.2@-5.73,75.211 R53.2@-5.73,76.722 ; 1.3,71.9 3.03,71.9 C35.1@3.908,72.778 ; C35.1@3.93,72.8 4.04,72.8 4.76,73.52 4.76,76.62 C36.1@4.02,77.36 ; -5.73,75.673 ccw(c-5.368,75.673) -5.624,75.417 cw(c-5.368,75.673) -5.73,75.673 ; -5.73,75.673 cw(c-6.092,75.673) -5.836,75.417 ccw(c-6.092,75.673) -5.73,75.673 ; -5.73,76.26 ccw(c-6.092,76.26) -5.836,76.516 cw(c-6.092,76.26) -5.73,76.26 ; -5.73,76.26 cw(c-5.368,76.26) -5.624,76.516 ccw(c-5.368,76.26) -5.73,76.26 ; 3.503,72.373 cw(c3.93,71.946) 3.93,72.55 ccw(c3.93,71.946) 3.503,72.373 ; C35.1@3.93,73.05 ccw(c3.93,73.919) 4.545,73.305 cw(c3.93,73.919) C35.1@3.93,73.05 ; C36.1@3.93,77.084 cw(c3.93,76.199) 4.555,76.824 ccw(c3.93,76.199) C36.1@3.93,77.084
  Bottom Layer w0.4: R54.2@-5.73,75.16 v1(-6.76,75.16) -6.76,71.18 -5.84,70.26 4.06,70.26 5.14,71.34 13.48,71.34 ; v1(-3.54,21.44) 2.52,21.44 3.88,22.8 3.88,29.82 4.25,30.19 v1(4.25,43.76) ; v1(9.38,64.88) 12.82,64.88 13.48,65.54 v1(13.48,76.1) ; -6.76,74.798 ccw(c-7.122,74.798) -6.866,75.054 cw(c-7.122,74.798) -6.76,74.798 ; -6.76,74.798 cw(c-6.398,74.798) v1@-6.654,75.054 ; -6.76,74.798 cw(c-6.398,74.798) v1@-6.654,75.054 ; v1@-6.654,75.054 cw(c-6.398,74.798) -6.398,75.16 ; v1@-6.654,75.054 cw(c-6.398,74.798) -6.398,75.16 ; -6.398,75.16 cw(c-6.398,75.522) -6.654,75.266 ccw(c-6.398,75.522) -6.398,75.16 ; -3.178,21.44 ccw(c-3.178,21.078) -3.434,21.334 cw(c-3.178,21.078) -3.178,21.44 ; -3.178,21.44 cw(c-3.178,21.802) -3.434,21.546 ccw(c-3.178,21.802) -3.178,21.44 ; 4.25,43.398 ccw(c3.888,43.398) 4.144,43.654 cw(c3.888,43.398) 4.25,43.398 ; 4.25,43.398 cw(c4.612,43.398) 4.356,43.654 ccw(c4.612,43.398) 4.25,43.398 ; 9.742,64.88 ccw(c9.742,64.518) 9.486,64.774 cw(c9.742,64.518) 9.742,64.88 ; 9.742,64.88 cw(c9.742,65.242) 9.486,64.986 ccw(c9.742,65.242) 9.742,64.88 ; 13.48,75.738 ccw(c13.118,75.738) 13.374,75.994 cw(c13.118,75.738) 13.48,75.738 ; 13.48,75.738 cw(c13.842,75.738) 13.586,75.994 ccw(c13.842,75.738) 13.48,75.738 ; -6.089,75.16 cw(c-6.089,74.752) -5.801,75.04 ccw(c-6.089,74.752) -6.089,75.16
  Bottom Layer w0.7: -9.36,63.18 v1(-9.36,63.82)
  Bottom Layer w0.8: U6.2@-28.38,59.45 -25.29,59.45 -23.66,61.08 -17.6,61.08 -15.52,63.16 -4.44,63.16 -3.54,62.26 -3.54,53.42 -15.76,41.2 -15.76,30.12 v2(-14.31,28.67) ; -10.833,63.16 ccw(c-10.833,65.293) -9.325,63.785 cw(c-10.833,65.293) -10.833,63.16 ; v1@-9.395,63.785 ccw(c-7.887,65.293) -7.887,63.16 cw(c-7.887,65.293) v1@-9.395,63.785
5V: C10.1 C24.2 LS1.1 M_L.4 M_R.4 PH1.8 R30.2 U1.5 U31.1 U32.1 U33.1 U34.1 U35.1 U36.1 | length 327.1
  Top Layer w0.3: -9.73,11.84 R30.2@-0.76,11.84 ; -1.439,11.84 cw(c-1.439,11.171) -0.966,11.644 ccw(c-1.439,11.171) -1.439,11.84
  Top Layer w0.5: U36.1@-29.17,73 -30.4,74.23 -30.4,79 cw(c-16,79) -16,93.4 4.38,93.4 6.9,90.88 8.71,90.88 11.23,93.4 16,93.4 cw(c16,79) 30.4,79 ; -28.04,86.76 -19.882,78.602 U35.1@-17.398,78.602 ; U34.1@-10,89.63 -8.8,90.83 -8.8,93.3 ; U32.1@15.602,80.398 15.602,82.762 23.8,90.96 ; v3(29.9,77.56) 30.4,78.06 30.4,79 ; -29.938,73.768 ccw(c-29.17,74.536) -29.17,73.45 cw(c-29.17,74.536) -29.938,73.768 ; -29.938,73.768 cw(c-30.706,73) -29.62,73 ccw(c-30.706,73) -29.938,73.768 ; -18.484,78.602 ccw(c-18.484,79.688) -17.716,78.92 cw(c-18.484,79.688) -18.484,78.602 ; -18.484,78.602 cw(c-18.484,77.516) -17.716,78.284 ccw(c-18.484,77.516) -18.484,78.602 ; -9.232,90.398 ccw(c-8.464,89.63) -9.55,89.63 cw(c-8.464,89.63) -9.232,90.398 ; -9.232,90.398 cw(c-10,91.166) -10,90.08 ccw(c-10,91.166) -9.232,90.398 ; 9.232,91.402 ccw(c8.464,92.17) 9.55,92.17 cw(c8.464,92.17) 9.232,91.402 ; 9.232,91.402 cw(c10,90.634) 10,91.72 ccw(c10,90.634) 9.232,91.402 ; 10.768,92.938 ccw(c11.536,92.17) 10.45,92.17 cw(c11.536,92.17) 10.768,92.938 ; 10.768,92.938 cw(c10,93.706) 10,92.62 ccw(c10,93.706) 10.768,92.938 ; 15.602,81.484 ccw(c16.688,81.484) 15.92,80.716 cw(c16.688,81.484) 15.602,81.484 ; 15.602,81.484 cw(c14.516,81.484) 15.284,80.716 ccw(c14.516,81.484) 15.602,81.484 ; 30.327,77.987 ccw(c30.754,77.56) 30.15,77.56 cw(c30.754,77.56) 30.327,77.987 ; 30.327,77.987 cw(c29.9,78.414) 29.9,77.81 ccw(c29.9,78.414) 30.327,77.987 ; 30.4,79 cw(c28.893,79) 29.757,77.765 ccw(c28.893,79) 30.4,79 ; 2.772,93.4 cw(c2.772,91.292) 4.263,92.783 ccw(c2.772,91.292) 2.772,93.4 ; LS1.1@3.979,93.4 cw(c3.979,92.499) 4.616,93.136 ccw(c3.979,92.499) LS1.1@3.979,93.4 ; LS1.1@4.51,92.08 cw(c4.51,89.207) 6.541,91.239 ccw(c4.51,89.207) LS1.1@4.51,92.08 ; LS1.1@4.51,92.58 cw(c4.51,90.914) 5.688,92.092 ccw(c4.51,90.914) LS1.1@4.51,92.58 ; LS1.1@4.51,93.08 cw(c4.51,92.621) 4.834,92.946 ccw(c4.51,92.621) LS1.1@4.51,93.08 ; v3@30.043,77.355 ccw(c29.564,78.04) 30.4,78.04 cw(c29.564,78.04) v3@30.043,77.355
  Top Layer w0.8: PH1.8@-19.04,64.77 v2(-14.06,64.76) ; U1.5@-9.72,6.035 -9.72,15.46 v2(-6.68,18.5) ; -18.195,64.768 ccw(c-18.197,63.923) -18.793,64.522 cw(c-18.197,63.923) -18.195,64.768 ; -18.195,64.768 cw(c-18.193,65.613) -18.792,65.017 ccw(c-18.193,65.613) -18.195,64.768
  Bottom Layer w0.5: U36.1@-29.17,73 -29.17,72.93 -22.28,66.04 -20.31,66.04 PH1.8@-19.04,64.77 ; v2(-6.68,18.5) 3.78,18.5 6.64,21.36 v3(6.64,36) ; U31.1@26.63,73 27.9,74.27 27.9,76.62 28.84,77.56 v3(29.9,77.56) ; -19.894,65.624 ccw(c-19.04,66.477) -19.04,65.27 cw(c-19.04,66.477) -19.894,65.624 ; -19.894,65.624 cw(c-20.747,64.77) -19.54,64.77 ccw(c-20.747,64.77) -19.894,65.624 ; -5.835,18.5 ccw(c-5.835,17.655) -6.433,18.253 cw(c-5.835,17.655) -5.835,18.5 ; -5.835,18.5 cw(c-5.835,19.345) -6.433,18.747 ccw(c-5.835,19.345) -5.835,18.5 ; 6.64,35.396 ccw(c6.036,35.396) 6.463,35.823 cw(c6.036,35.396) 6.64,35.396 ; 6.64,35.396 cw(c7.244,35.396) 6.817,35.823 ccw(c7.244,35.396) 6.64,35.396 ; 27.398,73.768 ccw(c28.166,73) 27.08,73 cw(c28.166,73) 27.398,73.768 ; 27.398,73.768 cw(c26.63,74.536) 26.63,73.45 ccw(c26.63,74.536) 27.398,73.768 ; 29.296,77.56 ccw(c29.296,78.164) 29.723,77.737 cw(c29.296,78.164) 29.296,77.56 ; 29.296,77.56 cw(c29.296,76.956) 29.723,77.383 ccw(c29.296,76.956) 29.296,77.56 ; U36.1@-29.17,72.55 cw(c-29.17,71.633) -28.521,72.281 ccw(c-29.17,71.633) U36.1@-29.17,72.55 ; U36.1@-28.72,73 ccw(c-27.465,73) -28.352,72.112 cw(c-27.465,73) U36.1@-28.72,73
  Bottom Layer w0.7: v3(-7.4,36) -6.64,36
  Bottom Layer w0.8: v2(-14.06,64.76) -13.76,65.06 -3.4,65.06 -2.02,63.68 -2.02,42.02 -6.68,37.36 ; v2(-6.68,18.5) -6.68,37.36 ; -6.68,37.36 cw(c-8.118,37.36) -7.447,36.088 ccw(c-8.118,37.36) -6.68,37.36 ; v2@-13.919,64.619 cw(c-12.853,63.553) -12.853,65.06 ccw(c-12.853,63.553) v2@-13.919,64.619 ; v3@-7.471,35.929 cw(c-9.38,34.02) -6.68,34.02 ccw(c-9.38,34.02) v3@-7.471,35.929
6.4V: C26.1 C29.1 C32.1 C38.1 L3.2 ML.2 ML.3 ML.6 MR.2 MR.3 MR.6 R51.2 | length 77
  Top Layer w0.4: R51.2@10.96,11.41 C29.1@10.96,12.81 12.33,14.18 ; C29.1@10.96,13.01 ccw(c10.96,13.493) 11.301,13.151 cw(c10.96,13.493) C29.1@10.96,13.01
  Top Layer w0.6: ML.3@-2.265,29.25 ML.6@-2.265,34.85
  Top Layer w1: -2.88,29.88 -2.88,26.04 -1.88,25.04 2.14,25.04 ; 2.21,33.087 ccw(c1.163,33.882) MR.3@2.463,34.08 ; 2.22,24.72 2.22,33.08 2.9,33.76 2.9,35.46
  Top Layer w1.2: L3.2@19.56,10.12 26.02,10.12 ; C32.1@26.02,5.77 C38.1@26.02,12.77 ; L3.2@20.904,9.266 cw(c22.964,7.206) 22.964,10.12 ccw(c22.964,7.206) L3.2@20.904,9.266
  Top Layer w1.5: 2,24.9 16.92,9.98 L3.2@20.44,9.98 ; 18.036,9.98 cw(c18.036,7.906) 19.503,9.373 ccw(c18.036,7.906) 18.036,9.98
7.4V: C8.1 C9.2 C31.1 R24.2 S1.3 U1.1 U1.3 U2.1 U2.3 U9.7 | length 70.9
  Top Layer w0.5: -22.93,7.75 C31.1@-22.93,9.58 ; C31.1@-22.91,9.68 R24.2@-21.291,9.68
  Top Layer w0.55: -14.32,1.2 U2.1@-14.32,3.416 ; -12.42,1.2 U2.3@-12.42,3.416 ; -9.73,1.31 U1.1@-9.73,3.436 ; -7.83,1.37 U1.3@-7.83,3.436
  Top Layer w1: 9.285,1.235 U9.7@9.285,4.245 ; 9.285,2.29 ccw(c10.39,2.29) 9.609,1.509 cw(c10.39,2.29) 9.285,2.29
  Top Layer w1.5: S1.3@-27.25,7.46 -20.76,7.46 -19.578,6.278 -14.5,1.2 -5.34,1.2 -3.994,2.546 cw(c0,4) 3.994,2.546 5.06,1.48 9.2,1.48 ; C8.1@-19.46,4.645 cw(c-19.46,0.987) -16.874,3.574 ccw(c-19.46,0.987) C8.1@-19.46,4.645
6050_INT: U0.27 U10.12 | length 7.5
  Top Layer w0.25: U0.27@1.45,75.1 1.45,73.87 v1(2.56,72.76) ; 2.176,73.144 ccw(c2.56,73.528) 2.56,72.985 cw(c2.56,73.528) 2.176,73.144 ; 2.176,73.144 cw(c1.792,72.76) 2.335,72.76 ccw(c1.792,72.76) 2.176,73.144
  Bottom Layer w0.25: U10.12@2,73.65 2.27,73.65 2.56,73.36 v1(2.56,72.76) ; 2.56,73.303 ccw(c3.103,73.303) 2.719,72.919 cw(c3.103,73.303) 2.56,73.303 ; 2.56,73.303 cw(c2.017,73.303) 2.401,72.919 ccw(c2.017,73.303) 2.56,73.303
6050_SCL: R54.1 U0.29 U10.23 | length 16.3
  Top Layer w0.25: v1(-4.52,75.44) -4.52,76.32 -3.82,77.02 -0.14,77.02 0.45,76.43 U0.29@0.45,75.1 ; -4.52,75.983 ccw(c-3.977,75.983) -4.361,75.599 cw(c-3.977,75.983) -4.52,75.983 ; -4.52,75.983 cw(c-5.063,75.983) -4.679,75.599 ccw(c-5.063,75.983) -4.52,75.983
  Bottom Layer w0.25: R54.1@-4.13,75.211 -3.269,75.211 -2.83,75.65 U10.23@-2,75.65 ; -3.708,75.211 ccw(c-3.708,74.789) -4.006,75.087 cw(c-3.708,74.789) -3.708,75.211 ; -3.708,75.211 cw(c-3.708,75.634) -4.006,75.335 ccw(c-3.708,75.634) -3.708,75.211 ; v1@-4.538,75.422 ccw(c-4.028,75.932) -4.028,75.211 cw(c-4.028,75.932) v1@-4.538,75.422 ; R54.1@-4.361,75.599 ccw(c-3.424,76.536) -3.424,75.211 cw(c-3.424,76.536) R54.1@-4.361,75.599
6050_SDA: R53.1 U0.30 U10.24 | length 15.8
  Top Layer w0.25: v1(-3.44,76.22) -3.16,76.5 ; U0.30@-0.05,75.1 -0.05,76.17 -0.38,76.5 -3.16,76.5 ; -3.16,76.5 ccw(c-2.993,76.333) -3.222,76.275 cw(c-2.993,76.333) -3.16,76.5 ; -3.16,76.5 cw(c-3.327,76.667) -3.385,76.438 ccw(c-3.327,76.667) -3.16,76.5 ; v1@-3.458,76.238 cw(c-2.824,75.604) -2.824,76.5 ccw(c-2.824,75.604) v1@-3.458,76.238 ; v1@-3.281,76.061 cw(c-2.221,75.001) -2.221,76.5 ccw(c-2.221,75.001) v1@-3.281,76.061
  Bottom Layer w0.25: R53.1@-4.13,76.722 -3.558,76.15 U10.24@-2,76.15 ; R53.1@-4.13,76.447 cw(c-4.13,75.783) -3.661,76.253 ccw(c-4.13,75.783) R53.1@-4.13,76.447 ; R53.1@-4.036,76.629 ccw(c-3.57,77.095) -3.473,76.443 cw(c-3.57,77.095) R53.1@-4.036,76.629 ; v1@-3.281,76.061 cw(c-3.066,75.846) -3.066,76.15 ccw(c-3.066,75.846) v1@-3.281,76.061 ; v1@-3.281,76.379 ccw(c-2.728,76.932) -2.728,76.15 cw(c-2.728,76.932) v1@-3.281,76.379
ADC_BAT: R24.1 R25.2 U0.8 | length 103.1
  Top Layer w0.25: v1(5.72,68.86) 6.62,68.86 7.06,69.3 U0.8@8.25,69.3 ; 6.263,68.86 ccw(c6.263,68.317) 5.879,68.701 cw(c6.263,68.317) 6.263,68.86 ; 6.263,68.86 cw(c6.263,69.403) 5.879,69.019 ccw(c6.263,69.403) 6.263,68.86
  Top Layer w0.3: R24.1@-21.291,11.28 -19.46,11.28 v1(-18.84,11.9) ; R24.1@-21.282,11.24 R24.1@-21.282,11.28 ; v1(-12.48,19.54) v1(-0.78,19.54) ; -20.829,11.28 ccw(c-20.829,10.918) -21.085,11.174 cw(c-20.829,10.918) -20.829,11.28 ; -20.829,11.28 cw(c-20.829,11.642) -21.085,11.386 ccw(c-20.829,11.642) -20.829,11.28 ; -20.242,11.28 ccw(c-20.242,11.642) -19.986,11.386 cw(c-20.242,11.642) -20.242,11.28 ; -20.242,11.28 cw(c-20.242,10.918) -19.986,11.174 ccw(c-20.242,10.918) -20.242,11.28 ; -19.181,11.559 ccw(c-19.523,11.9) -19.04,11.9 cw(c-19.523,11.9) -19.181,11.559 ; -19.181,11.559 cw(c-18.84,11.217) -18.84,11.7 ccw(c-18.84,11.217) -19.181,11.559 ; -11.997,19.54 ccw(c-11.997,19.057) -12.339,19.399 cw(c-11.997,19.057) -11.997,19.54 ; -11.997,19.54 cw(c-11.997,20.023) -12.339,19.681 ccw(c-11.997,20.023) -11.997,19.54 ; -1.263,19.54 ccw(c-1.263,20.023) -0.921,19.681 cw(c-1.263,20.023) -1.263,19.54 ; -1.263,19.54 cw(c-1.263,19.057) -0.921,19.399 ccw(c-1.263,19.057) -1.263,19.54 ; R25.2@-19.68,11.43 ccw(c-19.68,12.323) -19.048,11.692 cw(c-19.68,12.323) R25.2@-19.68,11.43
  Bottom Layer w0.25: v1(-0.78,19.54) 3.68,19.54 5.86,21.72 5.86,34.68 5.48,35.06 5.48,47 0.18,52.3 0.18,63.8 5.24,68.86 ; v1(5.72,68.86) 5.24,68.86 ; -0.237,19.54 ccw(c-0.237,18.997) -0.621,19.381 cw(c-0.237,18.997) -0.237,19.54 ; -0.237,19.54 cw(c-0.237,20.083) -0.621,19.699 ccw(c-0.237,20.083) -0.237,19.54 ; 5.24,68.86 ccw(c5.24,69.259) 5.547,69.004 cw(c5.24,69.259) 5.24,68.86 ; 5.24,68.86 cw(c5.24,68.461) 5.547,68.716 ccw(c5.24,68.461) 5.24,68.86
  Bottom Layer w0.3: v1(-18.84,11.9) -12.48,18.26 v1(-12.48,19.54) ; -18.499,12.241 ccw(c-18.157,11.9) -18.64,11.9 cw(c-18.157,11.9) -18.499,12.241 ; -18.499,12.241 cw(c-18.84,12.583) -18.84,12.1 ccw(c-18.84,12.583) -18.499,12.241 ; -12.48,19.057 ccw(c-12.963,19.057) -12.621,19.399 cw(c-12.963,19.057) -12.48,19.057 ; -12.48,19.057 cw(c-11.997,19.057) -12.339,19.399 ccw(c-11.997,19.057) -12.48,19.057
ADC_ML: ML.8 R9.1 U0.10 | length 51.1
  Top Layer w0.25: v1(5.72,70.46) 6.62,70.46 6.78,70.3 U0.10@8.25,70.3 ; 6.263,70.46 ccw(c6.263,69.917) 5.879,70.301 cw(c6.263,69.917) 6.263,70.46 ; 6.263,70.46 cw(c6.263,71.003) 5.879,70.619 ccw(c6.263,71.003) 6.263,70.46
  Top Layer w0.5: R9.1@-4.24,37.78 v1(-3.42,38.6) ; R9.1@-4.35,38.04 ccw(c-4.35,38.933) -3.719,38.301 cw(c-4.35,38.933) R9.1@-4.35,38.04
  Top Layer w1: ML.8@-4.96,34.26 R9.1@-4.96,37.74
  Bottom Layer w0.25: v1(-3.42,38.6) -0.92,41.1 -0.92,64.14 5.4,70.46 v1(5.72,70.46) ; -3.036,38.984 ccw(c-2.652,38.6) -3.195,38.6 cw(c-2.652,38.6) -3.036,38.984 ; -3.036,38.984 cw(c-3.42,39.368) -3.42,38.825 ccw(c-3.42,39.368) -3.036,38.984 ; 4.79,69.85 cw(c5.72,68.919) 5.72,70.235 ccw(c5.72,68.919) 4.79,69.85 ; 5.216,70.276 cw(c5.72,69.773) 5.72,70.485 ccw(c5.72,69.773) 5.216,70.276
ADC_MR: MR.8 R10.1 U0.9 | length 56.5
  Top Layer w0.25: v1(6.36,69.66) 6.5,69.8 U0.9@8.25,69.8 ; v1@6.519,69.501 cw(c7.241,68.779) 7.241,69.8 ccw(c7.241,68.779) v1@6.519,69.501
  Top Layer w1: R10.1@5,26.34 MR.8@5,29.84
  Bottom Layer w0.25: v1(4.98,29.24) 4.98,46.76 -0.38,52.12 -0.38,63.98 5.3,69.66 v1(6.36,69.66) ; 4.98,29.783 ccw(c5.523,29.783) 5.139,29.399 cw(c5.523,29.783) 4.98,29.783 ; 4.98,29.783 cw(c4.437,29.783) 4.821,29.399 ccw(c4.437,29.783) 4.98,29.783 ; 5.817,69.66 ccw(c5.817,70.203) 6.201,69.819 cw(c5.817,70.203) 5.817,69.66 ; 5.817,69.66 cw(c5.817,69.117) 6.201,69.501 ccw(c5.817,69.117) 5.817,69.66
BEEP: U0.22 U30.6 | length 19
  Top Layer w0.25: U30.6@-5.005,81.685 -5.005,82.615 -4.22,83.4 2.94,83.4 3.95,82.39 U0.22@3.95,75.1 ; U30.6@-4.98,82.36 cw(c-4.304,82.36) -4.782,82.838 ccw(c-4.304,82.36) U30.6@-4.98,82.36
BEEP_OUT: R40.1 U30.11 | length 16.8
  Top Layer w0.25: U30.11@-5,87.2 U30.11@-5,87.26
  Top Layer w0.3: U30.11@-5.005,87.235 -5.005,88.235 -4.66,88.58 -3.4,88.58 -1.34,86.52 R40.1@6.24,86.52 ; 5.131,86.52 ccw(c5.131,87.994) 6.173,86.952 cw(c5.131,87.994) 5.131,86.52 ; 5.855,86.52 ccw(c5.855,87.27) 6.385,86.74 cw(c5.855,87.27) 5.855,86.52
BOOT0: R26.1 U0.60 | length 3.7
  Top Layer w0.25: R26.1@4.45,61.6 U0.60@4.45,64 ; 4.45,62.022 ccw(c4.872,62.022) 4.574,61.724 cw(c4.872,62.022) 4.45,62.022 ; 4.45,62.022 cw(c4.028,62.022) 4.326,61.724 ccw(c4.028,62.022) 4.45,62.022
BOOT1: R27.1 U0.28 | length 6.8
  Top Layer w0.25: R27.1@-1.9,79.04 -1.9,78.96 -0.66,77.72 -0.04,77.72 0.95,76.73 U0.28@0.95,75.1 ; R27.1@-1.625,79.04 ccw(c-0.768,79.04) -1.374,78.434 cw(c-0.768,79.04) R27.1@-1.625,79.04
BT: JP21.1 JP21.2 JP21.3 JP21.4 JP21.5 JP21.6 JP21.7 JP21.8 JP21.9 JP21.10 JP21.11 JP21.12 JP21.13 JP21.14 S1.2 | length 12.6
  Bottom Layer w1.5: S1.2@-27.25,10 -27.09,10.16 -14.76,10.16
FLASH_CS: U0.33 U204.1 | length 14.9
  Top Layer w0.25: U204.1@-15.74,75.805 -14.685,75.805 -12.78,73.9 -6.1,73.9 -5.5,73.3 U0.33@-2.85,73.3 ; -14.788,75.805 ccw(c-14.788,75.503) -15.002,75.717 cw(c-14.788,75.503) -14.788,75.805 ; -14.788,75.805 cw(c-14.788,76.107) -15.002,75.893 ccw(c-14.788,76.107) -14.788,75.805
FLASH_SCK: U0.34 U204.6 | length 6
  Top Layer w0.25: U204.6@-7.74,73.265 -6.285,73.265 -5.82,72.8 U0.34@-2.85,72.8 ; -6.788,73.265 ccw(c-6.788,72.963) -7.002,73.177 cw(c-6.788,72.963) -6.788,73.265 ; -6.788,73.265 cw(c-6.788,73.567) -7.002,73.353 ccw(c-6.788,73.567) -6.788,73.265
FLASH_SI: U0.36 U204.5 | length 7.1
  Top Layer w0.25: U204.5@-7.74,71.995 -7.545,71.8 U0.36@-2.85,71.8 ; U204.5@-7.178,71.907 ccw(c-6.921,72.164) -6.921,71.8 cw(c-6.921,72.164) U204.5@-7.178,71.907 ; U204.5@-7.002,72.083 ccw(c-6.317,72.768) -6.317,71.8 cw(c-6.317,72.768) U204.5@-7.002,72.083
FLASH_SO: U0.35 U204.2 | length 14.8
  Top Layer w0.25: U204.2@-15.74,74.535 -14.255,74.535 -12.34,72.62 -6.46,72.62 -6.14,72.3 U0.35@-2.85,72.3 ; -14.788,74.535 ccw(c-14.788,74.233) -15.002,74.447 cw(c-14.788,74.233) -14.788,74.535 ; -14.788,74.535 cw(c-14.788,74.837) -15.002,74.623 ccw(c-14.788,74.837) -14.788,74.535
GND: 3.3V.2 C1.1 C5.1 C8.2 C9.1 C10.2 C11.2 C12.1 C14.1 C15.1 C16.1 C17.1 C24.1 C26.2 C29.2 C30.2 C31.2 C32.2 C33.2 C34.1 C35.2 C36.2 C38.2 D10.1 JP22.1 JP22.2 JP22.3 JP22.4 JP22.5 JP22.6 JP22.7 JP22.8 JP22.9 JP22.10 JP22.11 JP22.12 JP22.13 JP22.14 M_L.3 M_R.3 pad.0@12.3,1.5 pad.0@-4.2,23.78 pad.0@-4.74,8.68 pad.1 pad.2 pad.3 pad.4 pad.5 pad.6 pad.7 pad.8 pad.9 pad.10 pad.11 pad.12 pad.13 pad.14 pad.15 pad.16 pad.17 pad.18 pad.19 pad.20 pad.21 pad.22 pad.23 pad.24 pad.25 pad.26 pad.27 pad.28 pad.29 pad.30 pad.31 pad.32 pad.33 pad.34 pad.35 pad.36 pad.37 pad.38 pad.39 pad.40 pad.41 pad.42 pad.43 pad.44 pad.45 pad.46 pad.47 pad.48 pad.49 pad.50 pad.51 pad.52 pad.53 pad.54 pad.55 pad.56 pad.57 pad.58 pad.59 pad.60 pad.61 pad.62 pad.63 pad.64 pad.65 pad.66 pad.67 pad.68 pad.69 pad.70 pad.71 pad.72 pad.73 pad.74 pad.75 pad.76 pad.77 pad.78 pad.79 pad.80 pad.81 pad.82 pad.83 pad.84 pad.85 pad.86 pad.87 pad.88 pad.89 pad.90 pad.91 pad.92 pad.93 pad.94 pad.95 pad.96 pad.97 pad.98 pad.99 pad.100 pad.101 pad.102 pad.103 pad.104 pad.105 pad.106 pad.107 pad.108 pad.109 pad.110 pad.111 pad.112 pad.113 pad.114 pad.115 pad.116 PH1.7 PH2.1 PH2.2 PH2.3 PH2.4 R9.2 R10.2 R17.2 R18.2 R23.1 R25.1 R26.2 R27.2 R52.1 R55.1 RESET.2 U0.12 U0.18 U0.31 U0.47 U0.63 U1.2 U2.2 U5.7 U6.10 U8.3 U8.4 U9.6 U10.0 U10.1 U10.11 U10.18 U30.8 U31.3 U32.3 U33.3 U34.3 U35.3 U36.3 U204.4 Y1.0 | length 59.5
  Top Layer w0.25: U0.47@-2.04,66.3 -6.75,66.3 ; -6.75,66.3 cw(c-6.75,64.893) -5.736,65.869 ccw(c-6.75,64.893) -6.75,66.3 ; R23.1@-7.013,66.043 cw(c-6.393,65.423) -6.393,66.3 ccw(c-6.393,65.423) R23.1@-7.013,66.043 ; R23.1@-6.836,65.866 cw(c-5.789,64.819) -5.789,66.3 ccw(c-5.789,64.819) R23.1@-6.836,65.866 ; -6.162,66.3 cw(c-6.162,65.458) -5.556,66.042 ccw(c-6.162,65.458) -6.162,66.3 ; C14.1@-5.64,66.22 cw(c-5.446,66.026) -5.446,66.3 ccw(c-5.446,66.026) C14.1@-5.64,66.22 ; -5.575,66.3 cw(c-5.575,66.024) -5.376,66.215 ccw(c-5.575,66.024) -5.575,66.3 ; C14.1@-5.463,66.043 cw(c-4.843,65.423) -4.843,66.3 ccw(c-4.843,65.423) C14.1@-5.463,66.043 ; C14.1@-5.286,65.866 cw(c-4.239,64.819) -4.239,66.3 ccw(c-4.239,64.819) C14.1@-5.286,65.866
  Top Layer w0.3: R23.1@-7.06,65.99 -6.75,66.3 ; -0.98,66.3 -6.75,66.3 ; -0.55,73.23 U0.31@-0.55,75.1 ; U0.63@5.95,64 5.95,65.87 ; 5.95,73.23 U0.18@5.95,75.1 ; 6.38,71.3 U0.12@8.25,71.3 ; -6.75,66.3 ccw(c-6.561,66.111) -6.817,66.034 cw(c-6.561,66.111) -6.75,66.3 ; R23.1@-7.066,66.096 cw(c-6.574,65.604) -6.574,66.3 ccw(c-6.574,65.604) R23.1@-7.066,66.096 ; R23.1@-6.854,65.884 cw(c-5.849,64.879) -5.849,66.3 ccw(c-5.849,64.879) R23.1@-6.854,65.884 ; -6.721,66.3 cw(c-6.721,64.879) -5.716,65.884 ccw(c-6.721,64.879) -6.721,66.3 ; -5.996,66.3 cw(c-5.996,65.604) -5.504,66.096 ccw(c-5.996,65.604) -5.996,66.3 ; C14.1@-5.516,66.096 cw(c-5.024,65.604) -5.024,66.3 ccw(c-5.024,65.604) C14.1@-5.516,66.096 ; C14.1@-5.304,65.884 cw(c-4.299,64.879) -4.299,66.3 ccw(c-4.299,64.879) C14.1@-5.304,65.884
  Bottom Layer w0.25: U10.18@-1.25,72.9 -1.25,73.41 U10.0@-0.56,74.1 ; U10.1@-1.25,76.9 -1.25,76.39 U10.0@-0.72,75.86 ; U10.0@0.73,74.15 U10.11@2,74.15 ; -1.13,73.53 ccw(c-1.646,74.046) -0.998,74.382 cw(c-1.646,74.046) -1.13,73.53 ; -1.13,73.53 cw(c-0.431,72.831) -0.23,73.799 ccw(c-0.431,72.831) -1.13,73.53 ; U10.18@-1.25,73.175 cw(c-0.683,73.175) -1.084,73.576 ccw(c-0.683,73.175) U10.18@-1.25,73.175 ; U10.1@-1.25,76.625 ccw(c-0.683,76.625) -1.084,76.224 cw(c-0.683,76.625) U10.1@-1.25,76.625 ; -1.082,76.222 cw(c-1.811,75.493) -0.832,75.172 ccw(c-1.811,75.493) -1.082,76.222 ; U10.0@-0.98,76.12 ccw(c-0.136,76.964) -0.058,75.773 cw(c-0.136,76.964) U10.0@-0.98,76.12 ; U10.0@-0.889,73.771 ccw(c-1.328,74.211) -0.777,74.497 cw(c-1.328,74.211) U10.0@-0.889,73.771 ; U10.0@-0.803,73.857 cw(c-0.318,73.373) -0.179,74.043 ccw(c-0.318,73.373) U10.0@-0.803,73.857 ; U10.0@-0.795,75.935 cw(c-1.378,75.351) -0.594,75.095 ccw(c-1.378,75.351) U10.0@-0.795,75.935